# Altium PCB osc_evo.PcbDoc (part 4 of 5)
Units mm, origin at the board's own origin, x right, y up, seen from the top; angles counter-clockwise.
Board outline 145 x 85 mm, 4 copper layers (Top Layer, Mid-Layer 1, Mid-Layer 2, Bottom Layer); 114 components, 170 nets, 648 pads, 625 vias.
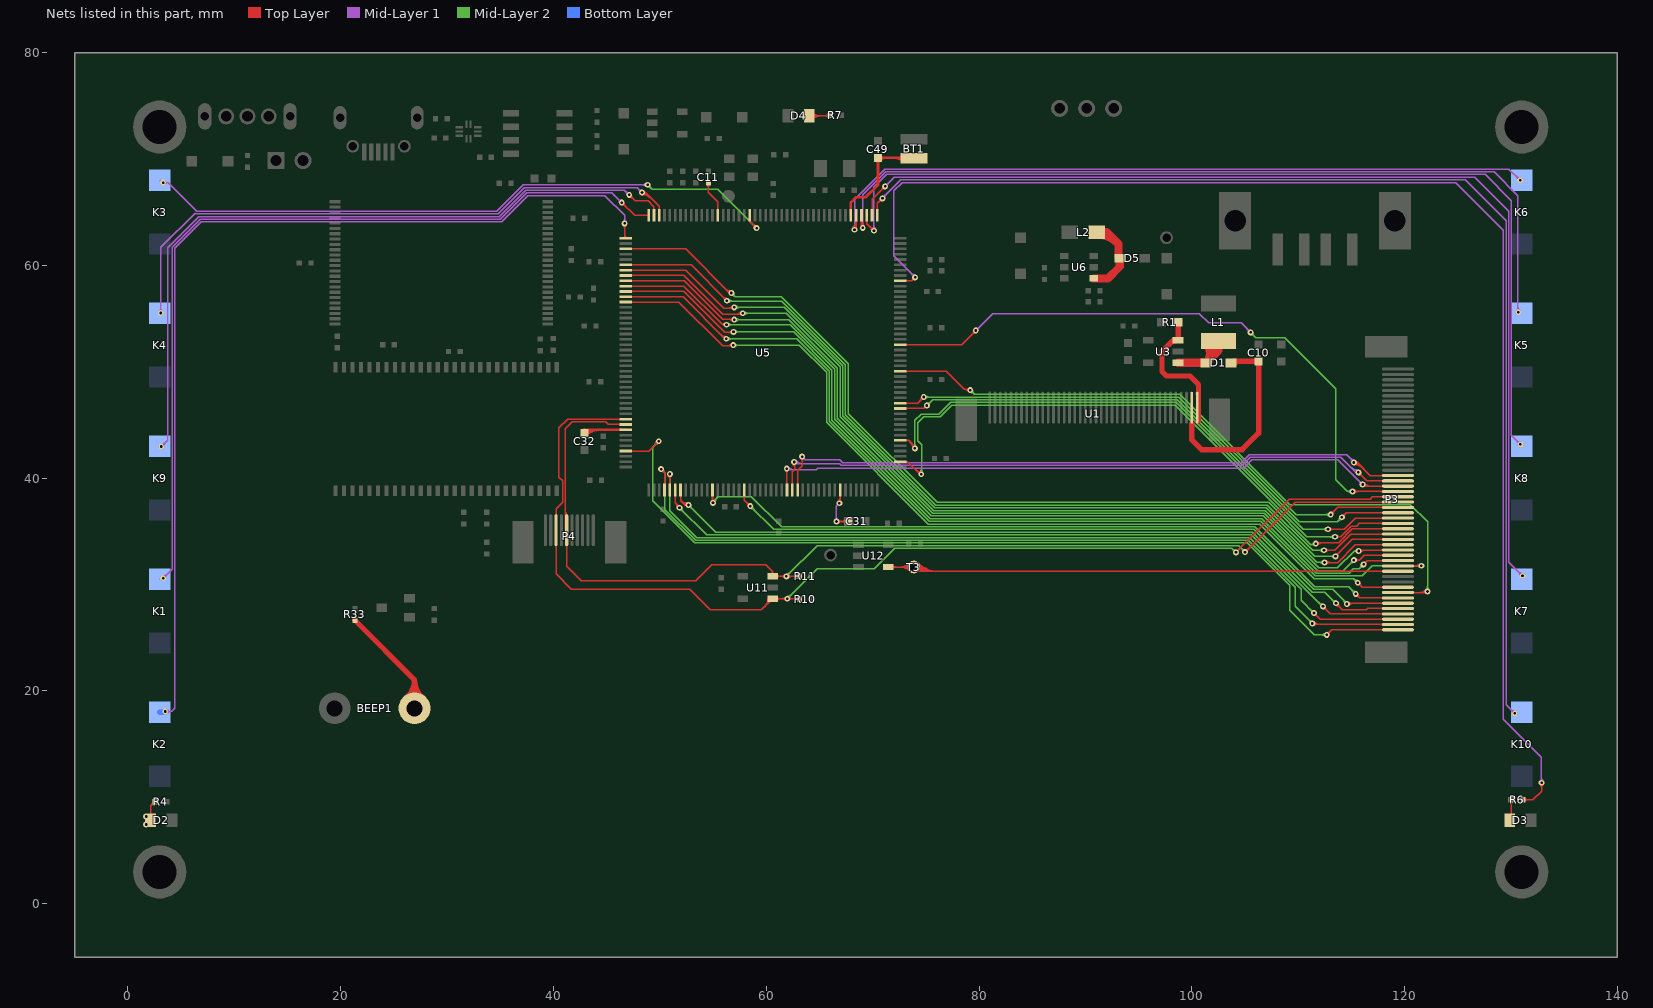
[diagram p6: the nets of this part, all layers, seen from the top]

## Via types
v1: diameter 0.55, hole 0.25, Top Layer to Bottom Layer, tented both sides, 463 vias
v2: diameter 0.55, hole 0.25, Top Layer to Bottom Layer, 156 vias
v3: diameter 0.45, hole 0.2, Top Layer to Bottom Layer, tented both sides, 4 vias
v4: diameter 1.5, hole 1.5, Top Layer to Bottom Layer, tented both sides, 2 vias

## Nets (pads, with @x,y where several pads share a name; then routed paths per layer and width w, separated by ;. In a path a pad name is that pad's centre, name@x,y a point inside that pad or via, vN(x,y) a via of type N, cw(c..) or ccw(c..) an arc to the next point about the centre after c; other vN are vias at no path point) (continued)
LED1: R6.2 U5.168 | length 130.2
  Top Layer w0.127: U5.168@72.6,58.55 73.7,58.55 ; U5.168@73.118,58.507 cw(c73.223,58.402) 73.223,58.55 cw(c73.223,58.698) U5.168@73.118,58.593 ; v1@73.792,58.839 cw(c73.467,58.783) 73.7,58.55 ; v1@73.991,58.664 ccw(c73.975,58.275) 73.7,58.55 ; v1(74,58.875) 74,58.85 73.7,58.55 ; R6.2@131.125,9.775 132.05,9.775 132.875,10.6 v2(132.875,11.375) ; R6.2@131.257,9.643 cw(c131.575,9.325) 131.575,9.775 cw(c131.575,10.225) R6.2@131.257,9.907 ; v2@132.725,11.225 cw(c132.364,10.864) 132.875,10.864 cw(c133.386,10.864) v2@133.025,11.225
  Mid-Layer 1 w0.127: v1@73.789,58.875 ccw(c73.278,58.875) 73.639,59.236 ccw(c74,59.597) v1@74,59.086 ; v1(74,58.875) 71.98,60.895 71.98,66.995 72.764,67.78 124.795,67.78 129.275,63.3 129.275,17.325 132.85,13.75 v2@132.85,11.375 ; v2@132.725,11.525 ccw(c132.425,11.825) 132.85,11.825 ; 132.85,11.946 ccw(c133.446,11.946) v2@133.025,11.525
LEDK(+): C10.1 D1.2 U1.2 | length 18.9
  Top Layer w0.508: 100,45.125 100,43.6 100.925,42.675 104.725,42.675 106.275,44.225 C10.1@106.275,50.975 103.835,50.975 D1.2@103.685,50.825 ; D1.2@103.884,50.711 cw(c104.521,50.074) 104.521,50.975
LEDK(-): R1.1 U1.1 U3.3 | length 15
  Top Layer w0.254: U1.1@100.5,46.625 U1.1@100.5,48.05
  Top Layer w0.508: 97.995,52.695 cw(c98.5,52.189) U3.3@98.5,52.904 ; R1.1@98.725,54.65 98.725,52.975 U3.3@98.7,52.95 98.25,52.95 97.2,51.9 97.2,50.025 97.625,49.6 99.825,49.6 100.625,48.8 U1.1@100.625,45.35 ; U1.1@100.591,47.909 ccw(c100.51,47.99) U1.1@100.625,47.99
NetBEEP1_2: BEEP1.2 R33.2 | length 16.8
  Top Layer w0.508: R33.2@21.35,26.65 26.95,21.05 ; BEEP1.2@26.148,19.329 ccw(c24.703,21.049) 26.95,21.049 ; BEEP1.2@26.475,18.94 ccw(c25.619,19.959) 26.95,19.959 ccw(c28.281,19.959) BEEP1.2@27.425,18.94 ; BEEP1.2@26.95,18.375 26.95,21.05 ; BEEP1.2@27.752,19.329 cw(c29.197,21.049) 26.95,21.049
NetBT1_1: BT1.1 C49.1 U5.6 | length 13.7
  Top Layer w0.254: U5.6@67.95,64.7 67.95,65.925 68.425,66.4 69.35,66.4 70.5,67.55 C49.1@70.5,70.1 73.848,70.1 BT1.1@73.889,70.059 ; C49.1@70.32,69.92 cw(c69.887,69.487) 70.5,69.487 cw(c71.113,69.487) 70.68,69.92 cw(c71.113,69.487) 71.113,70.1 cw(c71.113,70.713) C49.1@70.68,70.28 ; 72.139,70.1 cw(c72.139,69.06) BT1.1@72.875,69.795 ; 72.337,70.1 ccw(c72.337,70.861) BT1.1@72.875,70.323
NetC11_1: C11.1 U5.31 | length 4.4
  Top Layer w0.127: C11.1@54.443,67.618 cw(c54.125,67.3) 54.575,67.3 cw(c55.025,67.3) C11.1@54.707,67.618 ; C11.1@54.575,67.75 54.575,66.875 55.45,66 U5.31@55.45,64.7 ; U5.31@55.407,65.218 ccw(c55.302,65.323) 55.45,65.323 ccw(c55.598,65.323) U5.31@55.494,65.218
NetC31_1: C31.1 U5.125 | length 9.3
  Top Layer w0.127: v1(66.6,35.925) 67.375,35.925 C31.1@67.7,35.6 ; v1@66.725,37.8 ccw(c66.183,38.342) U5.125@66.95,38.342 ; v1@66.75,35.775 cw(c67.111,35.414) 67.111,35.925 cw(c67.111,36.436) v1@66.75,36.075 ; v1@66.815,37.71 ccw(c66.49,38.035) 66.95,38.035 ; v1(66.875,37.65) 67,37.775 66.95,37.825 U5.125@66.95,38.9 ; 66.898,35.925 ccw(c66.898,36.777) C31.1@67.5,36.175 ; U5.125@66.907,38.382 cw(c66.802,38.277) 66.95,38.277 cw(c67.098,38.277) U5.125@66.993,38.382 ; 66.95,37.98 ccw(c67.205,37.98) v1@67.025,37.8 ; 67.019,35.925 cw(c67.019,35.244) C31.1@67.5,35.725 ; 67.205,35.925 ccw(c67.205,36.47) C31.1@67.59,36.085 ; 67.325,35.925 cw(c67.325,35.55) C31.1@67.59,35.815
  Mid-Layer 1 w0.127: v1@66.45,36.075 ccw(c66.089,36.436) 66.6,36.436 ccw(c67.111,36.436) v1@66.75,36.075 ; v1(66.6,35.925) 66.6,37.375 v1(66.875,37.65)
NetC32_1: C32.1 U5.81 | length 6
  Top Layer w0.254: C32.1@42.9,44.575 42.925,44.55 U5.81@46.8,44.55 ; C32.1@42.925,44.25 cw(c43.649,43.526) 43.649,44.55 ; C32.1@43.105,44.07 cw(c44.263,42.912) 44.263,44.55
NetD1_1: D1.1 L1.2 U3.1 | length 10.6
  Top Layer w0.762: U3.1@98.7,50.85 101.3,50.85 D1.1@101.325,50.825 ; L1.2@101.336,52.642 cw(c100.411,51.739) D1.1@101.325,50.825 ; 101.87,51.37 ccw(c100.963,52.278) L1.2@101.881,53.175 ; L1.2@102.239,52.639 cw(c101.609,52.009) 102.5,52.009 cw(c103.391,52.009) L1.2@102.761,52.639 ; L1.2@102.5,52.9 102.5,52 D1.1@101.325,50.825
NetD2_2: D2.2 R4.1 | length 2.6
  Top Layer w0.127: D2.2@2.15,7.85 2.15,9.2 R4.1@2.55,9.6 ; R4.1@2.364,9.6 cw(c1.913,9.6) 2.232,9.282 cw(c2.55,8.963) R4.1@2.55,9.414
  other v1: 1.725,7.45 1.725,8.2
NetD3_2: D3.2 R6.1 | length 2.7
  Top Layer w0.127: D3.2@129.875,7.85 130.025,8 R6.1@130.025,9.775 ; R6.1@129.893,9.643 cw(c129.575,9.325) 130.025,9.325 cw(c130.475,9.325) R6.1@130.157,9.643
NetD4_2: D4.2 R7.1 | length 5.8
  Top Layer w0.127: D4.2@64.05,74.05 65.9,74.05 R7.1@65.95,74.1 ; D4.2@64.275,73.825 cw(c64.817,73.283) 64.817,74.05 cw(c64.817,74.816) D4.2@64.275,74.274 ; D4.2@64.364,73.736 cw(c65.123,72.977) 65.123,74.05 cw(c65.123,75.123) D4.2@64.364,74.364 ; 65.379,74.05 ccw(c65.379,74.671) R7.1@65.818,74.232 ; 65.62,74.05 cw(c65.62,73.77) R7.1@65.818,73.968 ; 65.686,74.05 ccw(c65.686,74.364) R7.1@65.908,74.142
NetD5_1: D5.1 L2.2 U6.1 | length 9.5
  Top Layer w0.762: U6.1@90.8,58.775 92.125,58.775 93.225,59.875 D5.1@93.225,60.675 93.1,60.8 93.1,62 91.975,63.125 L2.2@91.065,63.125 ; L2.2@91.192,62.871 cw(c91.192,60.367) 92.962,62.138
NetK1_2: K1.2 U5.44 | length 82.6
  Top Layer w0.127: v1@46.425,65.689 cw(c46.425,65.178) 46.786,65.539 cw(c47.147,65.9) v1@46.636,65.9 ; v1(46.425,65.9) 47.625,64.7 U5.44@48.95,64.7 ; U5.44@48.907,64.657 ccw(c48.802,64.552) 48.802,64.7 ccw(c48.802,64.848) U5.44@48.907,64.743
  Mid-Layer 1 w0.127: v1(3.325,30.6) 4.171,31.446 4.171,61.717 6.792,64.338 35.016,64.338 37.486,66.808 45.492,66.808 46.425,65.875 v1(46.425,65.9) ; v1@3.325,30.811 ccw(c3.325,31.322) 3.686,30.961 ccw(c4.047,30.6) v1@3.536,30.6 ; 46.021,66.279 ccw(c46.425,66.682) v1@46.425,66.111 ; 46.082,66.218 cw(c45.763,65.9) v1@46.214,65.9
  Bottom Layer w0.127: K1.2@3.056,30.5 cw(c3.056,30.331) K1.2@3.175,30.45 ; K1.2@3.114,30.609 cw(c3,30.614) K1.2@3,30.5 3.225,30.5 v1(3.325,30.6)
NetK2_2: K2.2 U5.45 | length 95
  Top Layer w0.127: v1@46.55,63.8 cw(c46.189,63.439) 46.7,63.439 cw(c47.211,63.439) v1@46.85,63.8 ; U5.45@46.7,62.633 ccw(c46.883,62.633) U5.45@46.754,62.504 ; 46.7,62.94 ccw(c47.19,62.94) U5.45@46.844,62.593 ; v1(46.7,63.95) 46.7,62.65 U5.45@46.8,62.55
  Mid-Layer 1 w0.127: v1(3.525,18.075) 4.125,18.075 4.425,18.375 4.425,61.612 6.897,64.084 35.134,64.084 37.604,66.554 44.846,66.554 46.7,64.7 v1(46.7,63.95) ; v1@3.675,17.925 cw(c4.036,17.564) 4.036,18.075 cw(c4.036,18.586) v1@3.675,18.225 ; v1@46.55,64.1 ccw(c46.189,64.461) 46.7,64.461 ccw(c47.211,64.461) v1@46.85,64.1
  Bottom Layer w0.508: K2.2@3,18 3.45,18 v1(3.525,18.075)
NetK3_2: K3.2 U5.25 | length 66.2
  Top Layer w0.127: U5.25@58.45,64.7 58.45,64.156 v1(59.103,63.503) ; U5.25@58.512,64.225 ccw(c58.827,64.225) 58.604,64.002 ; v1@58.891,63.503 ccw(c58.381,63.503) 58.742,63.864 ccw(c59.103,64.225) v1@59.103,63.715
  Mid-Layer 1 w0.127: v1(3.325,67.775) 3.825,67.775 ; v1@3.477,67.628 cw(c3.825,67.29) 3.825,67.775 ; v1@3.477,67.922 ccw(c3.825,68.26) 3.825,67.775 ; v1@48.705,67.42 ccw(c48.344,67.059) 48.344,67.57 ccw(c48.344,68.081) v1@48.705,67.72 ; v1(48.855,67.57) 37.17,67.57 34.7,65.1 6.5,65.1 3.825,67.775
  Mid-Layer 2 w0.127: v1@48.855,67.359 cw(c48.855,66.848) 49.216,67.209 cw(c49.577,67.57) v1@49.066,67.57 ; v1(48.855,67.57) 49.275,67.15 55.456,67.15 v1(59.103,63.503) ; v1@58.891,63.503 ccw(c58.381,63.503) 58.742,63.864 ccw(c59.103,64.225) v1@59.103,63.715
  Bottom Layer w0.127: K3.2@3.035,67.965 cw(c2.844,67.775) K3.2@3.114,67.775 ; K3.2@3.229,67.964 cw(c3.14,68.14) K3.2@3,68 3.225,67.775 v1(3.325,67.775)
NetK4_2: K4.2 U5.42 | length 61.6
  Top Layer w0.127: v1@48.325,66.639 cw(c48.325,65.343) 49.241,66.259 ; v1@48.325,66.766 cw(c48.325,65.777) 49.024,66.476 ; v1(48.325,66.85) 48.65,66.85 49.95,65.55 U5.42@49.95,64.7 ; v1@48.325,66.893 cw(c48.325,66.21) 48.807,66.693 ; v1@48.518,66.764 cw(c48.65,66.706) 48.65,66.85 cw(c48.65,66.994) v1@48.518,66.936 ; U5.42@49.907,65.218 ccw(c49.802,65.323) 49.95,65.323 ccw(c50.099,65.323) U5.42@49.994,65.218
  Mid-Layer 1 w0.127: v1@2.95,55.675 ccw(c2.589,56.036) 3.1,56.036 ccw(c3.611,56.036) v1@3.25,55.675 ; v1(3.1,55.525) 3.1,61.7 6.32,64.92 6.395,64.846 34.805,64.846 37.275,67.316 47.859,67.316 v1(48.325,66.85) ; v1@48.114,66.85 ccw(c47.603,66.85) 47.964,67.211 ccw(c48.325,67.572) v1@48.325,67.061
  Bottom Layer w0.127: K4.2@3,55.5 3.075,55.5 v1(3.1,55.525)
NetK5_2: K5.2 U5.4 | length 81.8
  Top Layer w0.127: U5.4@68.907,64.182 cw(c68.802,64.077) 68.95,64.077 cw(c69.098,64.077) U5.4@68.993,64.182 ; 68.95,64.031 ccw(c69.581,64.031) v1@69.135,63.585 ; U5.4@68.95,64.337 ccw(c69.887,64.337) v1@69.225,63.675 ; U5.4@68.95,64.7 68.95,63.65 v1(69.075,63.525)
  Mid-Layer 1 w0.127: v1@68.925,63.675 ccw(c68.564,64.036) 69.075,64.036 ccw(c69.586,64.036) v1@69.225,63.675 ; v1(69.075,63.525) 69.075,66.641 71.23,68.796 128.404,68.796 130.65,66.55 130.65,55.625 v1(130.675,55.6) ; v1@130.525,55.75 ccw(c130.225,56.05) 130.65,56.05 ; 130.65,56.171 ccw(c131.246,56.171) v1@130.825,55.75
NetK6_2: K6.2 U5.5 | length 72
  Top Layer w0.127: v1@68.15,63.5 ccw(c67.427,64.223) U5.5@68.45,64.223 ; v1@68.24,63.41 ccw(c67.734,63.916) 68.45,63.916 ; v1(68.3,63.35) 68.45,63.5 U5.5@68.45,64.7 ; v1@68.33,63.32 ccw(c68.04,63.61) 68.45,63.61 ; U5.5@68.407,64.182 cw(c68.302,64.077) 68.45,64.077 cw(c68.598,64.077) U5.5@68.493,64.182
  Mid-Layer 1 w0.127: v1@68.15,63.5 ccw(c67.789,63.861) 68.3,63.861 ccw(c68.811,63.861) v1@68.45,63.5 ; v1(68.3,63.35) 68.3,66.225 71.125,69.05 129.8,69.05 v1(130.85,68) ; v1@130.639,68 ccw(c130.128,68) 130.489,68.361 ccw(c130.85,68.722) v1@130.85,68.211
NetK7_2: K7.2 U5.2 | length 101
  Top Layer w0.127: U5.2@69.907,65.218 ccw(c69.802,65.323) 69.95,65.323 ccw(c70.098,65.323) U5.2@69.993,65.218 ; U5.2@69.95,64.7 69.95,66.2 v1(71.175,67.425) ; v1@70.964,67.425 cw(c70.453,67.425) 70.814,67.064 cw(c71.175,66.703) v1@71.175,67.214
  Mid-Layer 1 w0.127: v1(71.175,67.425) 72.038,68.288 126.587,68.288 129.425,65.45 129.783,65.092 129.783,32.117 v1(131.075,30.825) ; v1@71.175,67.636 ccw(c71.175,68.147) 71.536,67.786 ccw(c71.897,67.425) v1@71.386,67.425 ; v1@130.864,30.825 ccw(c130.353,30.825) 130.714,31.186 ccw(c131.075,31.547) v1@131.075,31.036
NetK8_2: K8.2 U5.3 | length 93.1
  Top Layer w0.127: U5.3@69.407,64.182 cw(c69.302,64.077) 69.45,64.077 cw(c69.598,64.077) U5.3@69.493,64.182 ; U5.3@69.45,64.7 69.45,63.925 v1(70.125,63.25) ; v1@69.914,63.25 ccw(c69.403,63.25) 69.764,63.611 ccw(c70.125,63.972) v1@70.125,63.461
  Mid-Layer 1 w0.127: v1@69.975,63.4 ccw(c69.614,63.761) 70.125,63.761 ccw(c70.636,63.761) v1@70.275,63.4 ; v1(70.125,63.25) 70.125,67.332 71.335,68.542 127.583,68.542 130.038,66.087 130.038,44.012 v1(130.875,43.175) ; v1@130.664,43.175 ccw(c130.153,43.175) 130.514,43.536 ccw(c130.875,43.897) v1@130.875,43.386
NetK9_2: K9.2 U5.43 | length 71.2
  Top Layer w0.127: v1@47.125,66.414 cw(c47.125,65.903) 47.486,66.264 cw(c47.847,66.625) v1@47.336,66.625 ; v1(47.125,66.625) 47.7,66.05 48.925,66.05 49.45,65.525 U5.43@49.45,64.7 ; U5.43@49.407,65.218 ccw(c49.302,65.323) 49.45,65.323 ccw(c49.599,65.323) U5.43@49.494,65.218
  Mid-Layer 1 w0.127: v1(3.15,42.975) 3.75,43.575 3.75,61.675 6.667,64.592 34.91,64.592 37.38,67.062 46.663,67.062 47.125,66.6 v1(47.125,66.625) ; v1@3.15,43.186 ccw(c3.15,43.697) 3.511,43.336 ccw(c3.872,42.975) v1@3.361,42.975 ; 46.721,67.004 ccw(c47.125,67.407) v1@47.125,66.836 ; 46.782,66.943 cw(c46.463,66.625) v1@46.914,66.625
  Bottom Layer w0.127: K9.2@3,43 3.125,43 v1(3.15,42.975)
NetK10_2: K10.2 U5.1 | length 112
  Top Layer w0.127: U5.1@70.407,65.218 ccw(c70.302,65.323) 70.45,65.323 ccw(c70.598,65.323) U5.1@70.493,65.218 ; U5.1@70.45,64.7 70.45,65.825 v1(70.925,66.3) ; v1@70.714,66.3 cw(c70.203,66.3) 70.564,65.939 cw(c70.925,65.578) v1@70.925,66.089
  Mid-Layer 1 w0.127: v1(70.925,66.3) 72.659,68.034 125.691,68.034 129.529,64.196 129.529,18.721 v1(130.35,17.9) ; v1@70.925,66.511 ccw(c70.925,67.022) 71.286,66.661 ccw(c71.647,66.3) v1@71.136,66.3 ; v1@130.139,17.9 ccw(c129.628,17.9) 129.989,18.261 ccw(c130.35,18.622) v1@130.35,18.111
NetP3_1: P3.1 U5.85 | length 89.9
  Top Layer w0.127: U5.85@46.8,42.55 48.975,42.55 v1(49.9,43.475) ; U5.85@47.319,42.507 cw(c47.424,42.402) 47.424,42.55 cw(c47.424,42.699) U5.85@47.319,42.594 ; v1@49.689,43.475 cw(c49.178,43.475) 49.539,43.114 cw(c49.9,42.753) v1@49.9,43.264 ; v1(112.675,25.275) 113.15,25.75 P3.1@119.375,25.75 ; v1@112.675,25.486 ccw(c112.675,25.997) 113.036,25.636 ccw(c113.397,25.275) v1@112.886,25.275 ; P3.1@117.964,25.689 ccw(c117.816,25.541) 117.816,25.75 ccw(c117.816,25.959) P3.1@117.964,25.811
  Mid-Layer 2 w0.127: v1@49.689,43.475 cw(c49.178,43.475) 49.539,43.114 cw(c49.9,42.753) v1@49.9,43.264 ; v1(49.9,43.475) 49.325,42.9 49.325,37.857 53.271,33.911 105.221,33.911 109.2,29.932 109.2,27.6 111.525,25.275 v1(112.675,25.275) ; v1@112.525,25.125 ccw(c112.164,24.764) 112.164,25.275 ccw(c112.164,25.786) v1@112.525,25.425
NetP3_2: P3.2 U5.92 | length 84.5
  Top Layer w0.127: v1(50.125,40.85) 50.45,40.525 ; v1@50.141,40.639 cw(c50.172,40.247) 50.45,40.525 ; v1@50.336,40.834 ccw(c50.728,40.803) 50.45,40.525 ; U5.92@50.407,39.419 ccw(c50.302,39.524) 50.45,39.524 ccw(c50.599,39.524) U5.92@50.494,39.419 ; U5.92@50.45,38.9 50.45,40.525 ; v1(111.325,26.35) 111.425,26.25 P3.2@119.375,26.25 ; v1@111.385,26.41 ccw(c111.77,26.795) 111.77,26.25 ; v1@111.475,26.2 cw(c111.594,26.081) 111.594,26.25 ; v1@111.475,26.5 ccw(c112.077,27.102) 112.077,26.25 ; P3.2@117.964,26.189 ccw(c117.816,26.041) 117.816,26.25 ccw(c117.816,26.459) P3.2@117.964,26.311
  Mid-Layer 2 w0.127: v1@50.126,40.639 cw(c50.127,40.133) 50.484,40.491 ; v1(50.125,40.85) 50.484,40.491 ; v1@50.336,40.849 ccw(c50.842,40.848) 50.484,40.491 ; v1@111.114,26.35 ccw(c110.603,26.35) 110.964,26.711 ccw(c111.325,27.072) v1@111.325,26.561 ; v1(111.325,26.35) 109.721,27.954 109.721,29.77 105.326,34.165 53.376,34.165 50.484,37.056 50.484,40.491
NetP3_3: P3.3 U5.93 | length 82
  Top Layer w0.127: v1@50.8,40.25 cw(c50.439,39.889) 50.95,39.889 cw(c51.461,39.889) v1@51.1,40.25 ; U5.93@50.907,39.419 ccw(c50.802,39.524) 50.95,39.524 ccw(c51.099,39.524) U5.93@50.994,39.419 ; U5.93@50.95,38.9 v1(50.95,40.4) ; v1@111.475,27.114 cw(c111.475,26.603) 111.836,26.964 cw(c112.197,27.325) v1@111.686,27.325 ; v1(111.475,27.325) 112.05,26.75 P3.3@119.375,26.75 ; P3.3@117.964,26.689 ccw(c117.816,26.541) 117.816,26.75 ccw(c117.816,26.959) P3.3@117.964,26.811
  Mid-Layer 2 w0.127: v1@50.8,40.25 cw(c50.439,39.889) 50.95,39.889 cw(c51.461,39.889) v1@51.1,40.25 ; v1(50.95,40.4) 50.95,36.95 53.481,34.419 105.44,34.419 110.275,29.584 110.275,28.525 v1(111.475,27.325) ; v1@111.264,27.325 ccw(c110.753,27.325) 111.114,27.686 ccw(c111.475,28.047) v1@111.475,27.536
NetP3_4: P3.4 U5.94 | length 77.6
  Top Layer w0.127: U5.94@51.407,38.382 cw(c51.302,38.277) 51.45,38.277 cw(c51.599,38.277) U5.94@51.494,38.382 ; U5.94@51.45,38.9 51.45,37.675 51.9,37.225 v1(51.85,37.225) ; 51.454,37.671 cw(c51.007,37.225) v1@51.639,37.225 ; 51.574,37.551 ccw(c51.85,37.826) v1@51.85,37.436 ; 51.67,37.455 cw(c51.441,37.225) v1@51.766,37.225 ; v1@112.325,27.739 cw(c112.325,27.228) 112.686,27.589 cw(c113.047,27.95) v1@112.536,27.95 ; v1(112.325,27.95) 113.025,27.25 P3.4@119.375,27.25 ; P3.4@117.964,27.189 ccw(c117.816,27.041) 117.816,27.25 ccw(c117.816,27.459) P3.4@117.964,27.311
  Mid-Layer 2 w0.127: v1@51.85,37.014 cw(c51.85,36.503) 52.211,36.864 cw(c52.572,37.225) v1@52.061,37.225 ; v1(51.85,37.225) 54.402,34.673 105.577,34.673 112.325,27.925 v1(112.325,27.95) ; 111.921,28.329 ccw(c112.325,28.732) v1@112.325,28.161 ; 111.982,28.268 cw(c111.663,27.95) v1@112.114,27.95
NetP3_5: P3.5 U5.95 | length 77.9
  Top Layer w0.127: U5.95@51.907,38.382 cw(c51.802,38.277) 51.95,38.277 cw(c52.099,38.277) U5.95@51.994,38.382 ; U5.95@51.95,38.9 51.95,37.9 ; 52.119,37.731 ccw(c52.564,38.176) v1@52.684,37.558 ; 52.288,37.562 ccw(c52.619,37.893) v1@52.708,37.433 ; v1@52.507,37.389 ccw(c52.375,37.331) 52.375,37.475 ; v1@52.507,37.561 cw(c52.375,37.619) 52.375,37.475 ; v1@52.66,37.683 cw(c52.509,38.459) 51.95,37.9 ; v1(52.7,37.475) 52.625,37.4 52.6,37.4 52.525,37.475 52.375,37.475 ; v1@113.55,28.039 cw(c113.55,27.528) 113.911,27.889 cw(c114.272,28.25) v1@113.761,28.25 ; v1(113.55,28.25) 114.15,27.65 116.4,27.65 116.525,27.775 119.35,27.775 P3.5@119.375,27.75 ; 117.756,27.775 cw(c117.756,27.481) P3.5@117.964,27.689 ; 117.877,27.775 ccw(c117.877,27.898) P3.5@117.964,27.811 ; 51.95,37.9 52.375,37.475
  Mid-Layer 2 w0.127: v1@52.7,37.264 cw(c52.7,36.753) 53.061,37.114 cw(c53.422,37.475) v1@52.911,37.475 ; v1(52.7,37.475) 55.248,34.927 105.701,34.927 111.34,29.288 112.475,29.288 113.513,28.25 v1(113.55,28.25) ; 113.126,28.637 ccw(c113.55,29.061) v1@113.55,28.461 ; 113.215,28.548 cw(c112.917,28.25) v1@113.339,28.25
NetP3_6: P3.6 U5.107 | length 70.8
  Top Layer w0.127: U5.107@57.907,38.382 cw(c57.802,38.277) 57.95,38.277 cw(c58.098,38.277) U5.107@57.994,38.382 ; U5.107@57.95,38.9 57.95,37.925 v1(58.5,37.375) ; v1@58.289,37.375 ccw(c57.778,37.375) 58.139,37.736 ccw(c58.5,38.097) v1@58.5,37.586 ; v1(114.575,28.175) 114.65,28.25 P3.6@119.375,28.25 ; v1@114.635,28.115 cw(c114.96,27.79) 114.96,28.25 ; v1@114.725,28.025 cw(c115.267,27.483) 115.267,28.25 ; v1@114.725,28.325 ccw(c114.905,28.505) 114.905,28.25 ; P3.6@117.964,28.189 ccw(c117.816,28.041) 117.816,28.25 ccw(c117.816,28.459) P3.6@117.964,28.311
  Mid-Layer 2 w0.127: v1@58.5,37.164 cw(c58.5,36.653) 58.861,37.014 cw(c59.222,37.375) v1@58.711,37.375 ; v1(58.5,37.375) 60.694,35.181 105.806,35.181 111.445,29.542 113.233,29.542 114.5,28.275 114.5,28.1 v1(114.575,28.175) ; 114.196,28.579 cw(c113.793,28.175) v1@114.364,28.175 ; 114.257,28.518 ccw(c114.575,28.837) v1@114.575,28.386
NetP3_7: P3.7 U5.101 | length 74.3
  Top Layer w0.127: v1@54.85,37.825 ccw(c54.61,38.065) 54.95,38.065 ; U5.101@54.907,38.382 cw(c54.802,38.277) 54.95,38.277 cw(c55.099,38.277) U5.101@54.994,38.382 ; v1@54.95,37.575 U5.101@54.95,38.9 ; 54.95,38 ccw(c55.325,38) v1@55.06,37.735 ; U5.101@54.95,38.306 ccw(c55.631,38.306) v1@55.15,37.825 ; v1@115.4,28.914 cw(c115.4,28.403) 115.761,28.764 cw(c116.122,29.125) v1@115.611,29.125 ; v1(115.4,29.125) 115.775,28.75 P3.7@119.375,28.75 ; P3.7@117.964,28.689 ccw(c117.816,28.541) 117.816,28.75 ccw(c117.816,28.959) P3.7@117.964,28.811
  Mid-Layer 2 w0.127: v1@55,37.8 55.475,38.275 58.6,38.275 61.44,35.435 105.911,35.435 111.55,29.796 114.729,29.796 v1(115.4,29.125) ; v1@55,37.886 ccw(c55,38.095) 55.148,37.948 ; v1@55.084,37.675 cw(c55.59,37.675) 55.233,38.033 ; v1@55.211,37.675 cw(c56.024,37.675) 55.449,38.249 ; v1@115.189,29.125 ccw(c114.678,29.125) 115.039,29.486 ccw(c115.4,29.847) v1@115.4,29.336
  other v1: 55,37.675
NetP3_8: P3.8 U5.151 | length 69.2
  Top Layer w0.127: U5.151@72.6,50.05 76.9,50.05 78.6,48.35 ; U5.151@73.118,50.007 cw(c73.223,49.902) 73.223,50.05 cw(c73.223,50.198) U5.151@73.118,50.094 ; 78.845,48.35 ccw(c78.845,48.605) v1@79.025,48.425 ; 78.855,48.35 cw(c78.855,48.034) v1@79.108,48.224 ; v1@79.006,48.148 ccw(c78.6,47.841) 78.6,48.35 ; v1(79.175,48.275) 79.175,48.35 78.6,48.35 ; P3.8@119.375,29.25 122.05,29.25 v1(122.15,29.35) ; P3.8@120.786,29.189 cw(c120.934,29.041) 120.934,29.25 cw(c120.934,29.459) P3.8@120.786,29.311 ; 121.398,29.25 ccw(c121.398,30.102) v1@122,29.5 ; 121.705,29.25 ccw(c121.705,29.795) v1@122.09,29.41 ; 121.881,29.25 cw(c121.881,29.081) v1@122,29.2
  Mid-Layer 2 w0.127: v1@79.175,48.064 cw(c79.175,47.553) 79.536,47.914 cw(c79.897,48.275) v1@79.386,48.275 ; v1(79.175,48.275) 79.571,47.879 98.855,47.879 109.209,37.525 120.55,37.525 122.15,35.925 v1(122.15,29.35) ; v1@122,29.5 ccw(c121.639,29.861) 122.15,29.861 ccw(c122.661,29.861) v1@122.3,29.5
NetP3_9: P3.9 U5.57 | length 90.8
  Top Layer w0.127: U5.57@46.8,56.55 51.8,56.55 55.925,52.425 56.65,52.425 56.825,52.6 56.9,52.525 v1(56.9,52.5) ; U5.57@47.319,56.507 cw(c47.424,56.402) 47.424,56.55 cw(c47.424,56.698) U5.57@47.319,56.593 ; 56.208,52.425 ccw(c56.208,53.192) v1@56.75,52.65 ; 56.515,52.425 ccw(c56.515,52.885) v1@56.84,52.56 ; 56.57,52.425 cw(c56.57,52.17) v1@56.75,52.35 ; v1@115.6,29.964 cw(c115.6,29.453) 115.961,29.814 cw(c116.322,30.175) v1@115.811,30.175 ; v1(115.6,30.175) 116.025,29.75 P3.9@119.375,29.75 ; P3.9@117.964,29.689 ccw(c117.816,29.541) 117.816,29.75 ccw(c117.816,29.959) P3.9@117.964,29.811
  Mid-Layer 2 w0.127: v1(56.9,52.5) 63.101,52.5 65.668,49.933 65.668,45.233 75.212,35.689 106.375,35.689 111.505,30.559 115.191,30.559 115.6,30.15 v1(115.6,30.175) ; v1@57.05,52.35 cw(c57.411,51.989) 57.411,52.5 cw(c57.411,53.011) v1@57.05,52.65 ; 115.196,30.554 ccw(c115.6,30.957) v1@115.6,30.386 ; 115.257,30.493 cw(c114.938,30.175) v1@115.389,30.175
NetP3_12: P3.12 T3.1 U12.4 | length 62.9
  Top Layer w0.127: U12.4@71.475,31.65 T3.1@73.875,31.65 74.275,31.25 P3.12@119.375,31.25 ; U12.4@71.842,31.483 cw(c72.246,31.079) 72.246,31.65 cw(c72.246,32.221) U12.4@71.842,31.817 ; T3.1@73.496,31.271 ccw(c72.58,30.355) 72.58,31.65 ccw(c72.58,32.945) T3.1@73.496,32.029 ; T3.1@73.585,31.36 ccw(c72.886,30.661) 72.886,31.65 ccw(c72.886,32.639) T3.1@73.585,31.94 ; T3.1@73.675,31.45 ccw(c73.193,30.968) 73.193,31.65 ccw(c73.193,32.332) T3.1@73.675,31.85 ; T3.1@73.805,31.58 ccw(c74.603,32.378) 74.603,31.25 ; T3.1@73.895,31.67 ccw(c74.909,32.684) 74.909,31.25 ; T3.1@73.985,31.76 ccw(c75.216,32.991) 75.216,31.25 ; T3.1@74.075,31.85 ccw(c75.523,33.298) 75.523,31.25 ; T3.1@74.165,31.94 ccw(c75.829,33.604) 75.829,31.25 ; T3.1@74.254,32.029 ccw(c76.136,33.911) 76.136,31.25 ; P3.12@117.964,31.189 ccw(c117.816,31.041) 117.816,31.25 ccw(c117.816,31.459) P3.12@117.964,31.311
NetP3_13: P3.13 U5.56 | length 95.1
  Top Layer w0.127: U5.56@46.8,57.05 52.2,57.05 56.175,53.075 56.225,53.075 v1(56.25,53.1) ; U5.56@47.319,57.007 cw(c47.424,56.902) 47.424,57.05 cw(c47.424,57.198) U5.56@47.319,57.093 ; 55.718,53.532 ccw(c56.25,54.064) v1@56.25,53.311 ; 55.935,53.315 ccw(c56.25,53.63) v1@56.25,53.184 ; 55.96,53.29 cw(c55.769,53.1) v1@56.039,53.1 ; P3.13@119.375,31.75 119.4,31.775 v1(121.575,31.775) ; P3.13@120.786,31.689 cw(c120.994,31.481) 120.994,31.775 ; P3.13@120.786,31.811 ccw(c120.873,31.898) 120.873,31.775 ; v1@121.425,31.625 ccw(c121.064,31.264) 121.064,31.775 ccw(c121.064,32.286) v1@121.425,31.925
  Mid-Layer 2 w0.127: v1(56.25,53.1) 62.861,53.1 65.922,50.039 65.922,45.339 75.318,35.943 106.481,35.943 111.611,30.813 116.013,30.813 116.975,31.775 v1(121.575,31.775) ; v1@56.4,52.95 cw(c56.761,52.589) 56.761,53.1 cw(c56.761,53.611) v1@56.4,53.25 ; v1@121.425,31.625 ccw(c121.064,31.264) 121.064,31.775 ccw(c121.064,32.286) v1@121.425,31.925
NetP3_14: P3.14 U5.55 | length 90.9
  Top Layer w0.127: U5.55@46.8,57.55 52.25,57.55 56.1,53.7 56.9,53.7 56.925,53.725 v1(56.925,53.75) ; U5.55@47.319,57.507 cw(c47.424,57.402) 47.424,57.55 cw(c47.424,57.698) U5.55@47.319,57.593 ; 56.294,53.7 ccw(c56.294,54.381) v1@56.775,53.9 ; 56.535,53.7 cw(c56.535,53.36) v1@56.775,53.6 ; 56.6,53.7 ccw(c56.6,54.075) v1@56.865,53.81 ; v1(116.15,31.9) 116.5,32.25 ; v1@116.155,32.111 ccw(c116.165,32.585) 116.5,32.25 ; v1@116.361,31.905 cw(c116.835,31.915) 116.5,32.25 ; P3.14@117.964,32.189 ccw(c117.816,32.041) 117.816,32.25 ccw(c117.816,32.459) P3.14@117.964,32.311 ; P3.14@119.375,32.25 116.5,32.25
  Mid-Layer 2 w0.127: v1(56.925,53.75) 62.57,53.75 66.176,50.144 66.176,45.444 75.423,36.197 106.586,36.197 111.716,31.067 114.351,31.067 114.359,31.075 114.775,31.075 115.175,31.475 115.725,31.475 v1(116.15,31.9) ; v1@57.075,53.6 cw(c57.436,53.239) 57.436,53.75 cw(c57.436,54.261) v1@57.075,53.9 ; v1@115.939,31.9 cw(c115.428,31.9) 115.789,31.539 cw(c116.15,31.178) v1@116.15,31.689
NetP3_15: P3.15 U5.54 | length 90.6
  Top Layer w0.127: U5.54@46.8,58.05 52.25,58.05 55.85,54.45 ; U5.54@47.319,58.007 cw(c47.424,57.902) 47.424,58.05 cw(c47.424,58.198) U5.54@47.319,58.093 ; v1@56.095,54.314 ccw(c55.85,54.161) 55.85,54.45 ; v1@56.119,54.568 cw(c55.85,54.816) 55.85,54.45 ; v1(56.275,54.425) 56.25,54.45 55.85,54.45 ; v1(115.225,32.3) 115.75,32.3 116.2,32.75 P3.15@119.375,32.75 ; v1@115.375,32.15 cw(c115.736,31.789) 115.736,32.3 cw(c115.736,32.811) v1@115.375,32.45 ; P3.15@117.964,32.689 ccw(c117.816,32.541) 117.816,32.75 ccw(c117.816,32.959) P3.15@117.964,32.811
  Mid-Layer 2 w0.127: v1(56.275,54.425) 62.254,54.425 66.43,50.249 66.43,45.549 75.528,36.451 106.691,36.451 111.821,31.321 114.246,31.321 v1(115.225,32.3) ; v1@56.425,54.275 cw(c56.786,53.914) 56.786,54.425 cw(c56.786,54.936) v1@56.425,54.575 ; v1@115.014,32.3 cw(c114.503,32.3) 114.864,31.939 cw(c115.225,31.578) v1@115.225,32.089
NetP3_16: P3.16 U5.53 | length 91.2
  Top Layer w0.127: U5.53@46.8,58.55 52.3,58.55 55.925,54.925 56.95,54.925 56.975,54.9 v1(57,54.9) ; U5.53@47.319,58.507 cw(c47.424,58.402) 47.424,58.55 cw(c47.424,58.698) U5.53@47.319,58.593 ; 56.429,54.925 cw(c56.429,54.329) v1@56.85,54.75 ; 56.55,54.925 ccw(c56.55,55.35) v1@56.85,55.05 ; v1(115.675,33.15) 115.775,33.25 P3.16@119.375,33.25 ; v1@115.735,33.09 cw(c116.12,32.705) 116.12,33.25 ; v1@115.825,33 cw(c116.427,32.398) 116.427,33.25 ; v1@115.825,33.3 ccw(c115.944,33.419) 115.944,33.25 ; P3.16@117.964,33.189 ccw(c117.816,33.041) 117.816,33.25 ccw(c117.816,33.459) P3.16@117.964,33.311
  Mid-Layer 2 w0.127: v1(57,54.9) 62.138,54.9 66.684,50.354 66.684,45.654 75.633,36.705 106.796,36.705 111.926,31.575 113.675,31.575 115.25,33.15 ; v1@57.15,54.75 cw(c57.511,54.389) 57.511,54.9 cw(c57.511,55.411) v1@57.15,55.05 ; v1@115.506,33.022 ccw(c115.25,32.829) 115.25,33.15 ; v1@115.506,33.278 cw(c115.25,33.471) 115.25,33.15 ; v1(115.675,33.15) 115.25,33.15
NetP3_17: P3.17 U5.52 | length 91.6
  Top Layer w0.127: U5.52@46.8,59.05 52.275,59.05 55.925,55.4 57.775,55.4 57.8,55.425 v1(57.8,55.5) ; U5.52@47.319,59.007 cw(c47.424,58.902) 47.424,59.05 cw(c47.424,59.198) U5.52@47.319,59.093 ; 57.048,55.4 ccw(c57.048,56.252) v1@57.65,55.65 ; 57.355,55.4 ccw(c57.355,55.945) v1@57.74,55.56 ; 57.531,55.4 cw(c57.531,55.231) v1@57.65,55.35 ; v1(112.475,32.075) 113.7,32.075 115.375,33.75 P3.17@119.375,33.75 ; v1@112.625,31.925 cw(c112.986,31.564) 112.986,32.075 cw(c112.986,32.586) v1@112.625,32.225 ; P3.17@117.964,33.689 ccw(c117.816,33.541) 117.816,33.75 ccw(c117.816,33.959) P3.17@117.964,33.811
  Mid-Layer 2 w0.127: v1(57.8,55.5) 61.897,55.5 66.938,50.459 66.938,45.759 75.738,36.959 106.902,36.959 111.761,32.1 112.5,32.1 v1(112.475,32.075) ; v1@57.95,55.35 cw(c58.311,54.989) 58.311,55.5 cw(c58.311,56.011) v1@57.95,55.65 ; 111.904,32.1 cw(c111.904,31.504) v1@112.325,31.925 ; 112.025,32.1 ccw(c112.025,32.525) v1@112.325,32.225
NetP3_18: P3.18 U5.51 | length 91.3
  Top Layer w0.127: U5.51@46.8,59.55 52.45,59.55 56.025,55.975 56.775,55.975 56.85,56.05 v1(57,56.05) ; U5.51@47.319,59.507 cw(c47.424,59.402) 47.424,59.55 cw(c47.424,59.698) U5.51@47.319,59.593 ; 56.308,55.975 ccw(c56.308,56.742) v1@56.85,56.2 ; 56.615,55.975 ccw(c56.615,56.435) v1@56.94,56.11 ; 56.67,55.975 cw(c56.67,55.72) v1@56.85,55.9 ; v1(113.5,32.65) 115.1,34.25 P3.18@119.375,34.25 ; v1@113.5,32.861 ccw(c113.5,33.372) 113.861,33.011 ccw(c114.222,32.65) v1@113.711,32.65 ; P3.18@117.964,34.189 ccw(c117.816,34.041) 117.816,34.25 ccw(c117.816,34.459) P3.18@117.964,34.311
  Mid-Layer 2 w0.127: v1(57,56.05) 61.707,56.05 67.192,50.565 67.192,45.865 75.844,37.213 107.007,37.213 111.57,32.65 v1(113.5,32.65) ; v1@57.15,55.9 cw(c57.511,55.539) 57.511,56.05 cw(c57.511,56.561) v1@57.15,56.2 ; v1@113.35,32.5 ccw(c112.989,32.139) 112.989,32.65 ccw(c112.989,33.161) v1@113.35,32.8
NetP3_19: P3.19 U5.50 | length 90.9
  Top Layer w0.127: U5.50@46.8,60.05 52.95,60.05 v1@56.312,56.688 ; U5.50@47.319,60.007 cw(c47.424,59.902) 47.424,60.05 cw(c47.424,60.198) U5.50@47.319,60.093 ; 55.921,57.079 cw(c55.518,56.675) v1@56.089,56.675 ; 55.982,57.018 ccw(c56.3,57.337) v1@56.3,56.886 ; v1(112.425,33.225) 113.425,33.225 114.95,34.75 P3.19@119.375,34.75 ; v1@112.575,33.075 cw(c112.936,32.714) 112.936,33.225 cw(c112.936,33.736) v1@112.575,33.375 ; P3.19@117.964,34.689 ccw(c117.816,34.541) 117.816,34.75 ccw(c117.816,34.959) P3.19@117.964,34.811
  Mid-Layer 2 w0.127: v1@56.275,56.65 61.466,56.65 67.446,50.67 67.446,45.97 75.949,37.467 107.112,37.467 111.354,33.225 v1(112.425,33.225) ; v1@56.45,56.525 cw(c56.75,56.225) 56.75,56.65 ; v1@56.45,56.825 ccw(c56.871,57.246) 56.871,56.65 ; v1@112.275,33.075 ccw(c111.914,32.714) 111.914,33.225 ccw(c111.914,33.736) v1@112.275,33.375
  other v1: 56.3,56.675
NetP3_20: P3.20 U5.47 | length 92
  Top Layer w0.127: U5.47@46.8,61.55 52.425,61.55 56.575,57.4 v1(56.725,57.4) ; U5.47@47.319,61.507 cw(c47.424,61.402) 47.424,61.55 cw(c47.424,61.698) U5.47@47.319,61.593 ; 56.108,57.867 ccw(c56.725,58.484) v1@56.725,57.611 ; 56.325,57.65 ccw(c56.725,58.051) v1@56.725,57.484 ; 56.47,57.505 cw(c56.365,57.4) v1@56.514,57.4 ; v1@111.7,33.75 111.9,33.95 113.791,33.95 115.091,35.25 P3.20@119.375,35.25 ; v1@111.71,33.79 cw(c112.095,33.405) 112.095,33.95 ; v1@111.8,33.7 cw(c112.402,33.098) 112.402,33.95 ; v1@111.8,34 ccw(c111.919,34.119) 111.919,33.95 ; P3.20@117.964,35.189 ccw(c117.816,35.041) 117.816,35.25 ccw(c117.816,35.459) P3.20@117.964,35.311
  Mid-Layer 2 w0.127: v1(56.725,57.4) 57.075,57.05 ; v1@56.73,57.189 cw(c56.74,56.715) 57.075,57.05 ; v1@56.936,57.395 ccw(c57.41,57.385) 57.075,57.05 ; 111.376,33.75 ccw(c111.376,33.961) v1@111.572,33.882 ; 111.381,33.75 cw(c111.381,33.581) v1@111.5,33.7 ; v1@111.454,33.929 cw(c111.188,34.037) 111.188,33.75 ; v1@111.7,33.75 111.188,33.75 ; 57.075,57.05 61.425,57.05 67.7,50.775 67.7,46.075 76.054,37.721 107.217,37.721 111.188,33.75
  other v1: 111.65,33.85
NetP3_21: P3.21 U5.134 | length 63.3
  Top Layer w0.127: U5.134@72.6,41.55 73.275,41.55 v1@74.6,40.225 ; U5.134@73.118,41.507 cw(c73.223,41.402) 73.223,41.55 cw(c73.223,41.699) U5.134@73.118,41.594 ; 74.001,40.824 ccw(c74.575,41.399) v1@74.575,40.586 ; 74.217,40.608 ccw(c74.575,40.965) v1@74.575,40.459 ; 74.302,40.523 cw(c74.155,40.375) v1@74.364,40.375 ; v1(113.45,34.5) 113.982,34.5 114.986,35.504 115.504,35.504 115.75,35.75 P3.21@119.375,35.75 ; v1@113.6,34.35 cw(c113.961,33.989) 113.961,34.5 cw(c113.961,35.011) v1@113.6,34.65 ; P3.21@117.964,35.689 ccw(c117.816,35.541) 117.816,35.75 ccw(c117.816,35.959) P3.21@117.964,35.811
  Mid-Layer 2 w0.127: v1@74.425,40.525 ccw(c74.004,40.946) 74.6,40.946 ; v1@74.6,40.225 74.6,43.129 74.229,43.5 74.229,45.204 74.796,45.771 76.338,45.771 77.43,46.863 98.434,46.863 110.822,34.475 113.425,34.475 v1(113.45,34.5) ; 74.6,40.825 ccw(c75.025,40.825) v1@74.725,40.525 ; 112.879,34.475 ccw(c112.879,35.071) v1@113.3,34.65 ; 113,34.475 cw(c113,34.05) v1@113.3,34.35
  other v1: 74.575,40.375
NetP3_22: P3.22 U5.138 | length 60.1
  Top Layer w0.127: U5.138@72.6,43.55 73.375,43.55 74.025,42.9 74.025,42.85 v1(73.975,42.8) ; U5.138@73.118,43.507 cw(c73.223,43.402) 73.223,43.55 cw(c73.223,43.699) U5.138@73.118,43.594 ; 73.508,43.417 cw(c72.891,42.8) v1@73.764,42.8 ; 73.725,43.2 cw(c73.324,42.8) v1@73.891,42.8 ; 73.87,43.055 ccw(c73.975,43.16) v1@73.975,43.011 ; v1(112.8,35.2) 114.322,35.2 115.372,36.25 P3.22@119.375,36.25 ; v1@112.95,35.05 cw(c113.311,34.689) 113.311,35.2 cw(c113.311,35.711) v1@112.95,35.35 ; P3.22@117.964,36.189 ccw(c117.816,36.041) 117.816,36.25 ccw(c117.816,36.459) P3.22@117.964,36.311
  Mid-Layer 2 w0.127: v1@73.825,42.95 ccw(c73.464,43.311) 73.975,43.311 ccw(c74.486,43.311) v1@74.125,42.95 ; v1(73.975,42.8) 73.975,45.425 74.575,46.025 76.233,46.025 77.325,47.117 98.54,47.117 110.457,35.2 v1(112.8,35.2) ; v1@112.65,35.05 ccw(c112.289,34.689) 112.289,35.2 ccw(c112.289,35.711) v1@112.65,35.35
NetP3_23: P3.23 U5.144 | length 55.7
  Top Layer w0.127: U5.144@72.6,46.55 74.825,46.55 ; U5.144@73.118,46.507 cw(c73.223,46.402) 73.223,46.55 cw(c73.223,46.699) U5.144@73.118,46.594 ; v1@74.893,46.781 cw(c74.647,46.728) 74.825,46.55 ; v1@75.056,46.618 ccw(c75.003,46.372) 74.825,46.55 ; v1(75.1,46.825) 74.825,46.55 ; v1(114.1,36.325) 114.525,36.75 P3.23@119.375,36.75 ; v1@114.1,36.536 ccw(c114.1,37.047) 114.461,36.686 ccw(c114.822,36.325) v1@114.311,36.325 ; P3.23@117.964,36.689 ccw(c117.816,36.541) 117.816,36.75 ccw(c117.816,36.959) P3.23@117.964,36.811
  Mid-Layer 2 w0.127: v1(75.1,46.825) 75.646,47.371 98.645,47.371 110.116,35.9 113.675,35.9 v1(114.1,36.325) ; v1@75.1,47.036 ccw(c75.1,47.547) 75.461,47.186 ccw(c75.822,46.825) v1@75.311,46.825 ; v1@113.889,36.325 cw(c113.378,36.325) 113.739,35.964 cw(c114.1,35.603) v1@114.1,36.114
NetP3_24: P3.24 U5.145 | length 55.6
  Top Layer w0.127: U5.145@72.6,47.05 74.225,47.05 v1(74.8,47.625) ; U5.145@73.118,47.007 cw(c73.223,46.902) 73.223,47.05 cw(c73.223,47.199) U5.145@73.118,47.094 ; v1@74.589,47.625 cw(c74.078,47.625) 74.439,47.264 cw(c74.8,46.903) v1@74.8,47.414 ; v1(113.05,36.575) 113.725,37.25 P3.24@119.375,37.25 ; v1@113.05,36.786 ccw(c113.05,37.297) 113.411,36.936 ccw(c113.772,36.575) v1@113.261,36.575 ; P3.24@117.964,37.189 ccw(c117.816,37.041) 117.816,37.25 ccw(c117.816,37.459) P3.24@117.964,37.311
  Mid-Layer 2 w0.127: v1(74.8,47.625) 98.75,47.625 109.8,36.575 v1(113.05,36.575) ; v1@74.95,47.475 cw(c75.311,47.114) 75.311,47.625 cw(c75.311,48.136) v1@74.95,47.775 ; v1@112.9,36.425 ccw(c112.539,36.064) 112.539,36.575 ccw(c112.539,37.086) v1@112.9,36.725
NetP3_25: P3.25 P4.5 R11.1 U5.80 U11.3 | length 111.5
  Top Layer w0.127: P4.5@41.125,36.357 ccw(c41.147,36.357) P4.5@41.132,36.342 ; 41.125,36.664 ccw(c41.454,36.664) P4.5@41.221,36.431 ; 41.125,36.971 ccw(c41.761,36.971) P4.5@41.311,36.521 ; P4.5@41.189,33.699 cw(c41.041,33.551) 41.25,33.551 cw(c41.459,33.551) P4.5@41.311,33.699 ; U5.80@46.282,45.007 ccw(c46.177,44.902) 46.177,45.05 ccw(c46.177,45.199) U5.80@46.282,45.094 ; U5.80@46.8,45.05 45.146,45.05 44.9,45.296 41.796,45.296 41.125,44.625 41.125,35.235 P4.5@41.25,35.11 41.25,31.725 42.625,30.35 53.375,30.35 54.875,31.85 59.975,31.85 60.6,31.225 ; U11.3@60.466,30.97 ccw(c60.29,31.225) 60.6,31.225 ; U11.3@60.734,30.97 cw(c60.91,31.225) 60.6,31.225 ; U11.3@60.967,30.608 cw(c61.371,30.204) 61.371,30.775 cw(c61.371,31.346) U11.3@60.967,30.942 ; v1@61.75,30.625 ccw(c61.389,30.264) 61.389,30.775 ccw(c61.389,31.286) v1@61.75,30.925 ; v1@62.05,30.625 cw(c62.411,30.264) 62.411,30.775 cw(c62.411,31.286) v1@62.05,30.925 ; R11.1@62.968,30.643 ccw(c62.65,30.325) 62.65,30.775 ccw(c62.65,31.225) R11.1@62.968,30.907 ; R11.1@63.1,30.775 v1(61.9,30.775) U11.3@60.6,30.775 60.6,31.225 ; v1(105,33.05) 109.7,37.75 P3.25@119.375,37.75 ; v1@105,33.261 ccw(c105,33.772) 105.361,33.411 ccw(c105.722,33.05) v1@105.211,33.05 ; P3.25@117.964,37.689 ccw(c117.816,37.541) 117.816,37.75 ccw(c117.816,37.959) P3.25@117.964,37.811
  Mid-Layer 2 w0.127: v1(61.9,30.775) 64.782,33.657 104.393,33.657 v1(105,33.05) ; v1@61.9,30.986 ccw(c61.9,31.497) 62.261,31.136 ccw(c62.622,30.775) v1@62.111,30.775 ; v1@104.789,33.05 ccw(c104.278,33.05) 104.639,33.411 ccw(c105,33.772) v1@105,33.261
NetP3_26: P3.26 P4.3 R10.1 U5.79 U11.1 | length 116
  Top Layer w0.127: P4.3@40.189,33.699 cw(c40.041,33.551) 40.25,33.551 cw(c40.459,33.551) P4.3@40.311,33.699 ; P4.3@40.189,36.521 ccw(c40.041,36.669) 40.25,36.669 ccw(c40.459,36.669) P4.3@40.311,36.521 ; U5.79@46.282,45.507 ccw(c46.177,45.402) 46.177,45.55 ccw(c46.177,45.699) U5.79@46.282,45.594 ; U5.79@46.8,45.55 41.35,45.55 40.525,44.725 40.525,40.1 40.871,39.754 40.871,37.746 40.25,37.125 P4.3@40.25,35.11 40.25,31 41.7,29.55 52.8,29.55 54.725,27.625 59.55,27.625 U11.1@60.6,28.675 v1(61.975,28.675) 63.075,28.675 R10.1@63.125,28.625 ; 59.855,27.93 ccw(c59.11,28.675) U11.1@60.164,28.675 ; 60.072,28.147 ccw(c59.543,28.675) U11.1@60.291,28.675 ; 60.288,28.363 ccw(c59.977,28.675) U11.1@60.418,28.675 ; U11.1@60.967,28.508 cw(c61.371,28.104) 61.371,28.675 cw(c61.371,29.246) U11.1@60.967,28.842 ; v1@61.825,28.525 ccw(c61.464,28.164) 61.464,28.675 ccw(c61.464,29.186) v1@61.825,28.825 ; v1@62.125,28.525 cw(c62.486,28.164) 62.486,28.675 cw(c62.486,29.186) v1@62.125,28.825 ; 62.554,28.675 cw(c62.554,28.054) R10.1@62.993,28.493 ; 62.795,28.675 ccw(c62.795,28.955) R10.1@62.993,28.757 ; 62.861,28.675 cw(c62.861,28.361) R10.1@63.083,28.583 ; v1(104.15,33.025) 109.15,38.025 116.75,38.025 116.975,38.25 P3.26@119.375,38.25 ; v1@104.15,33.236 ccw(c104.15,33.747) 104.511,33.386 ccw(c104.872,33.025) v1@104.361,33.025 ; P3.26@117.964,38.189 ccw(c117.816,38.041) 117.816,38.25 ccw(c117.816,38.459) P3.26@117.964,38.311
  Mid-Layer 2 w0.127: v1(61.975,28.675) 64.775,31.475 70.147,31.475 72.075,33.403 103.772,33.403 v1(104.15,33.025) ; v1@61.975,28.886 ccw(c61.975,29.397) 62.336,29.036 ccw(c62.697,28.675) v1@62.186,28.675 ; v1@103.939,33.025 ccw(c103.428,33.025) 103.789,33.386 ccw(c104.15,33.747) v1@104.15,33.236
NetP3_27: P3.27 U5.156 | length 65.2
  Top Layer w0.127: U5.156@72.6,52.55 78.375,52.55 v1(79.7,53.875) ; U5.156@73.118,52.507 cw(c73.223,52.402) 73.223,52.55 cw(c73.223,52.698) U5.156@73.118,52.594 ; v1@79.489,53.875 cw(c78.978,53.875) 79.339,53.514 cw(c79.7,53.153) v1@79.7,53.664 ; v1(115.1,38.75) P3.27@119.375,38.75 ; v1@115.25,38.6 cw(c115.611,38.239) 115.611,38.75 cw(c115.611,39.261) v1@115.25,38.9 ; P3.27@117.964,38.689 ccw(c117.816,38.541) 117.816,38.75 ccw(c117.816,38.959) P3.27@117.964,38.811
  Mid-Layer 1 w0.127: v1(79.7,53.875) 81.301,55.476 100.712,55.476 101.604,54.584 104.641,54.584 v1(105.525,53.7) ; v1@79.7,54.086 ccw(c79.7,54.597) 80.061,54.236 ccw(c80.422,53.875) v1@79.911,53.875 ; v1@105.314,53.7 ccw(c104.803,53.7) 105.164,54.061 ccw(c105.525,54.422) v1@105.525,53.911
  Mid-Layer 2 w0.127: v1@105.525,53.489 cw(c105.525,52.978) 105.886,53.339 cw(c106.247,53.7) v1@105.736,53.7 ; v1(105.525,53.7) 106.025,53.2 108.75,53.2 113.525,48.425 113.525,39.85 114.625,38.75 ; v1@114.943,38.608 ccw(c114.625,38.322) 114.625,38.75 ; v1@114.943,38.892 cw(c114.625,39.178) 114.625,38.75 ; v1(115.1,38.75) 114.625,38.75
NetP3_28: P3.28 U5.115 | length 66.1
  Top Layer w0.127: v1@61.775,40.75 cw(c61.354,40.329) 61.95,40.329 ; U5.115@61.907,39.419 ccw(c61.802,39.524) 61.95,39.524 ccw(c62.098,39.524) U5.115@61.994,39.419 ; U5.115@61.95,38.9 61.95,40.9 62.025,40.975 v1@62,40.975 ; 61.95,40.45 cw(c62.375,40.45) v1@62.075,40.75 ; v1@116.02,39.37 ccw(c116.31,39.66) 116.31,39.25 ; v1(116.05,39.4) 116.2,39.25 P3.28@119.375,39.25 ; v1@116.11,39.46 ccw(c116.616,39.966) 116.616,39.25 ; v1@116.2,39.55 ccw(c116.923,40.273) 116.923,39.25 ; P3.28@117.964,39.189 ccw(c117.816,39.041) 117.816,39.25 ccw(c117.816,39.459) P3.28@117.964,39.311
  Mid-Layer 1 w0.127: v1@61.985,40.96 ccw(c62.37,41.345) 62.37,40.8 ; v1@62,40.975 62.175,40.8 64.693,40.8 64.848,40.955 104.858,40.955 105.616,41.713 113.737,41.713 v1(116.05,39.4) ; v1@62.075,40.75 cw(c62.194,40.631) 62.194,40.8 ; v1@62.075,41.05 ccw(c62.677,41.652) 62.677,40.8 ; v1@115.839,39.4 ccw(c115.328,39.4) 115.689,39.761 ccw(c116.05,40.122) v1@116.05,39.611
  other v1: 61.925,40.9
NetP3_29: P3.29 U5.116 | length 67.2
  Top Layer w0.127: U5.116@62.407,39.419 ccw(c62.302,39.524) 62.45,39.524 ccw(c62.598,39.524) U5.116@62.494,39.419 ; U5.116@62.45,38.9 62.45,40.6 62.7,40.85 62.7,41.45 v1(62.625,41.525) ; v1@62.477,41.374 cw(c61.963,40.846) 62.7,40.846 ; v1@62.566,41.464 cw(c62.257,41.147) 62.7,41.147 ; 62.7,41.195 cw(c62.955,41.195) v1@62.775,41.375 ; v1@115.65,40.339 cw(c115.65,39.828) 116.011,40.189 cw(c116.372,40.55) v1@115.861,40.55 ; v1(115.65,40.55) 116.45,39.75 P3.29@119.375,39.75 ; P3.29@117.964,39.689 ccw(c117.816,39.541) 117.816,39.75 ccw(c117.816,39.959) P3.29@117.964,39.811
  Mid-Layer 1 w0.127: v1@62.595,41.495 ccw(c62.945,41.845) 62.945,41.35 ; v1(62.625,41.525) 62.8,41.35 66.932,41.35 67.073,41.209 104.752,41.209 105.51,41.967 114.008,41.967 115.55,40.425 115.65,40.425 v1(115.65,40.55) ; v1@62.685,41.585 ccw(c63.251,42.151) 63.251,41.35 ; v1@62.775,41.675 ccw(c63.558,42.458) 63.558,41.35 ; 114.905,41.07 ccw(c115.65,41.815) v1@115.65,40.761 ; 115.122,40.853 ccw(c115.65,41.382) v1@115.65,40.634 ; 115.338,40.637 ccw(c115.65,40.948) v1@115.65,40.507
NetP3_30: P3.30 U5.117 | length 66.3
  Top Layer w0.127: U5.117@62.907,39.419 ccw(c62.802,39.524) 62.95,39.524 ccw(c63.098,39.524) U5.117@62.993,39.419 ; U5.117@62.95,38.9 62.95,40.725 63.375,41.15 v1(63.375,42.025) ; v1@63.225,41.875 cw(c62.864,41.514) 63.375,41.514 cw(c63.886,41.514) v1@63.525,41.875 ; v1@115.225,41.264 cw(c115.225,40.029) 116.098,40.902 ; v1@115.225,41.391 cw(c115.225,40.462) 115.881,41.119 ; v1(115.225,41.475) 115.525,41.475 ; v1@115.225,41.518 cw(c115.225,40.896) 115.665,41.335 ; v1@115.424,41.404 cw(c115.525,41.368) 115.525,41.475 ; v1@115.424,41.546 ccw(c115.525,41.582) 115.525,41.475 ; P3.30@117.964,40.189 ccw(c117.816,40.041) 117.816,40.25 ccw(c117.816,40.459) P3.30@117.964,40.311 ; P3.30@119.375,40.25 116.75,40.25 115.525,41.475
  Mid-Layer 1 w0.127: v1(63.375,42.025) 63.679,41.721 ; v1@63.402,41.815 cw(c63.445,41.487) 63.679,41.721 ; v1@63.585,41.998 ccw(c63.913,41.955) 63.679,41.721 ; 114.811,41.964 cw(c114.322,41.475) v1@115.014,41.475 ; 114.992,41.783 ccw(c115.225,42.016) v1@115.225,41.686 ; 115.028,41.747 cw(c114.755,41.475) v1@115.141,41.475 ; v1(115.225,41.475) 115.225,41.5 115.25,41.525 114.554,42.221 105.405,42.221 104.647,41.463 67.178,41.463 66.92,41.721 63.679,41.721